# Altium PCB Snap4.PcbDoc
Units mil, origin at the board's own origin, x right, y up, seen from the top; angles counter-clockwise.
Board outline 3550 x 1850 mil, 2 copper layers (Top Layer, Bottom Layer); 59 components, 63 nets, 240 pads, 4 vias.
Unrouted connection lines stored in the file: 142.
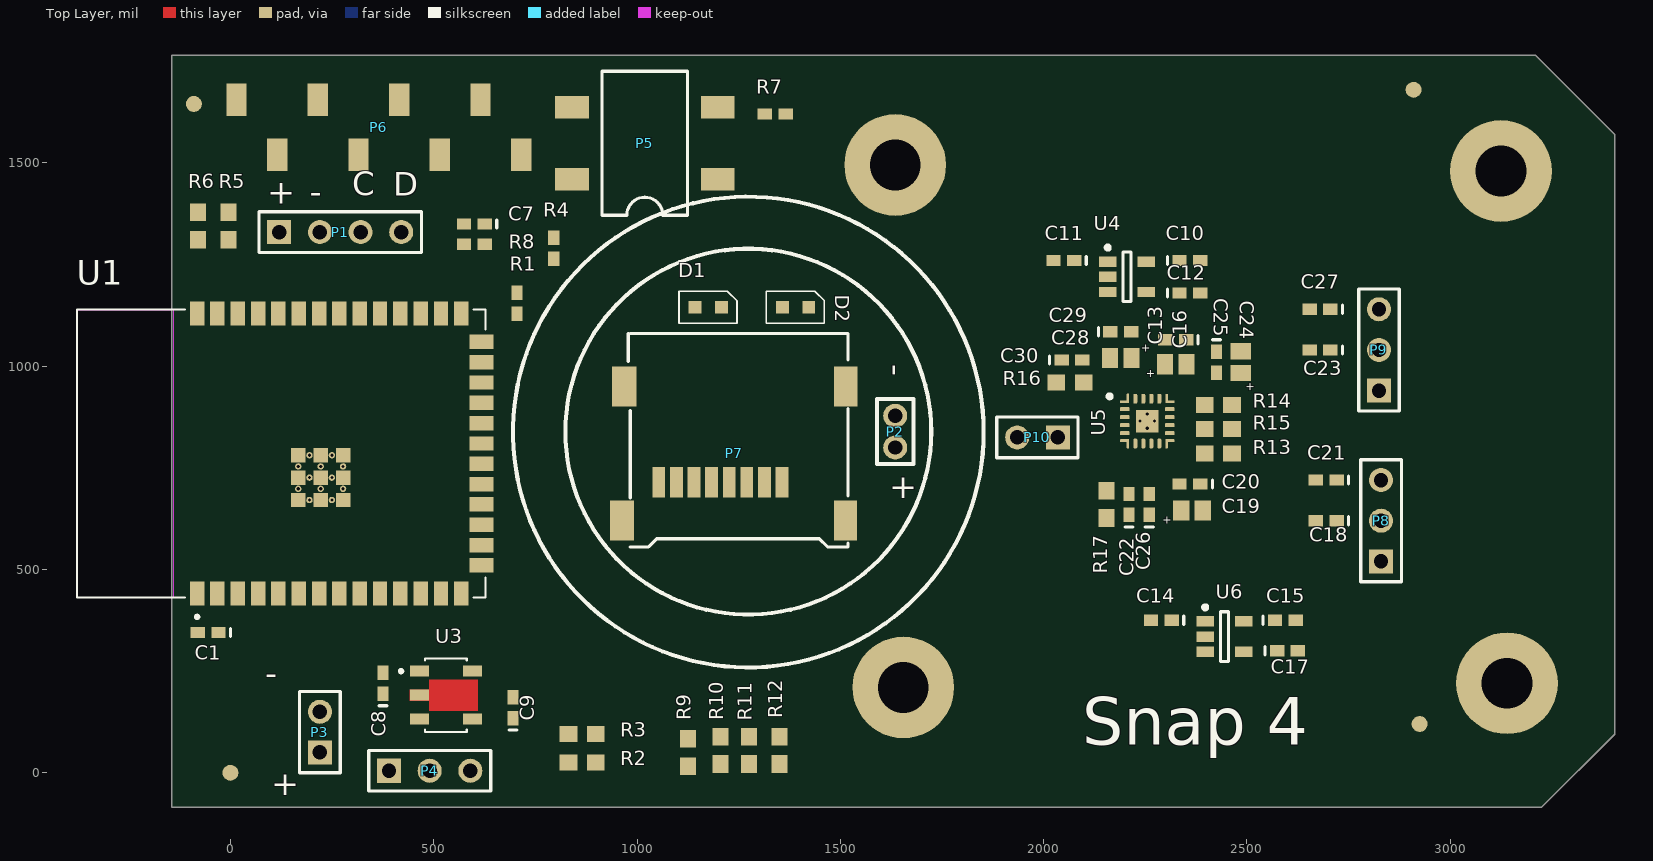
[diagram p0: Top Layer view]
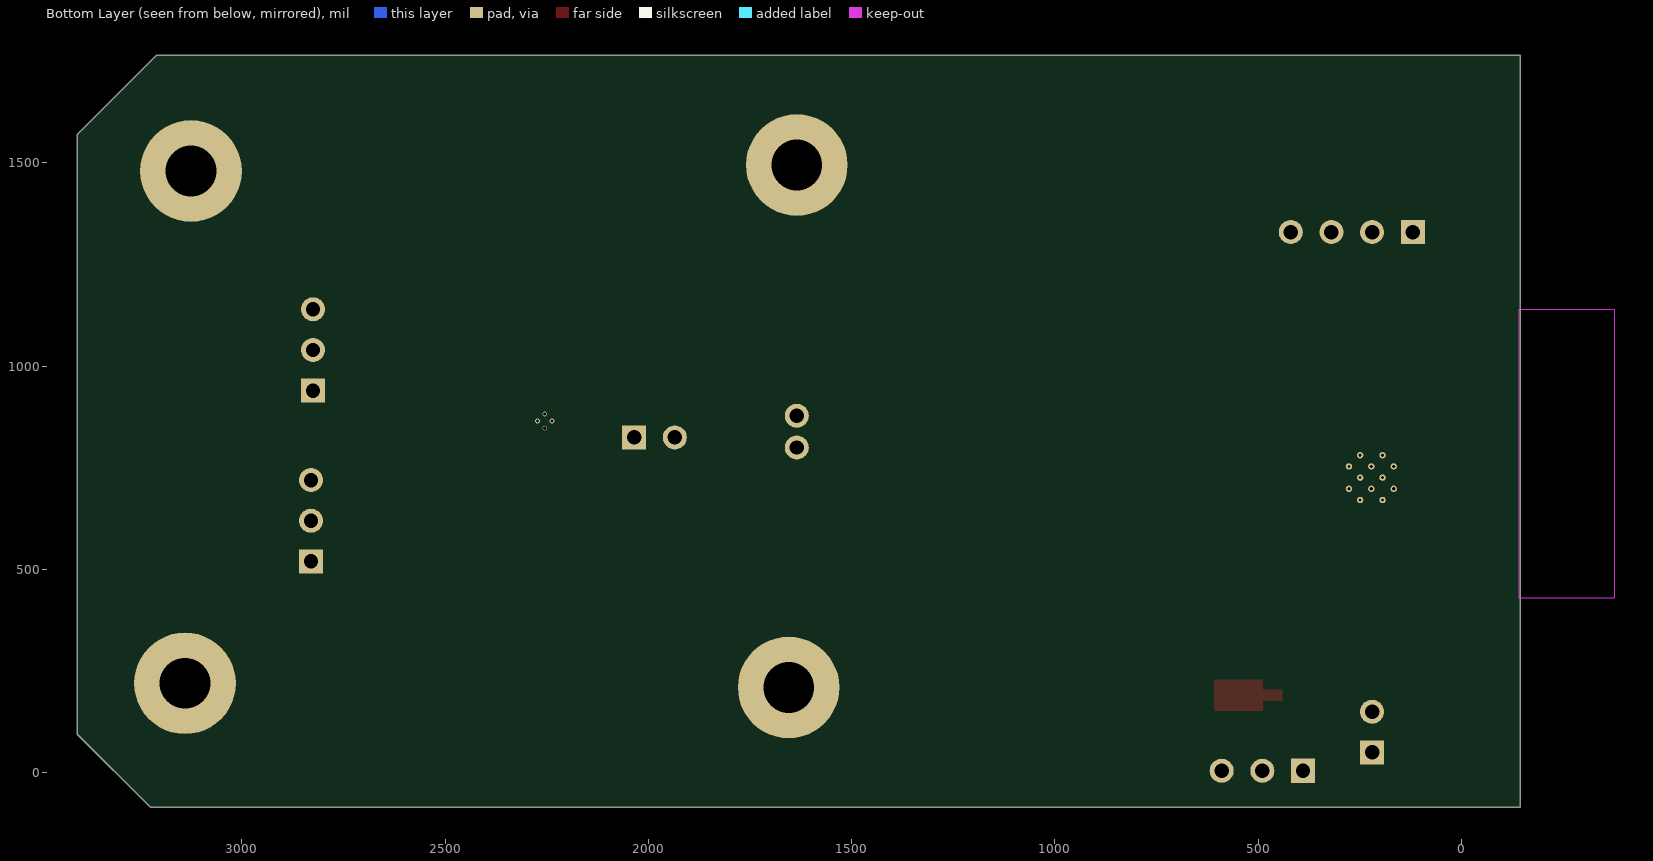
[diagram p1: Bottom Layer view, seen from below]

## Layer stack, top to bottom
Top Solder: solder mask 0.4, Solder Resist, Dk 3.5
Top Layer: signal copper 1.4
Dielectric 1: dielectric 12.6, FR-4, Dk 4.8
Bottom Layer: signal copper 1.4
Bottom Solder: solder mask 0.4, Solder Resist, Dk 3.5

## Board outline
-145,-85 -145,1765 3210,1765 3405,1570 3405,95 3225,-85

## Design rules (kind name [scope] priority, off if disabled: settings)
Clearance [All] p1: gap=10 ignorepadtopadclearanceinfootprint=FALSE except(0: Arc-Hole Track-Hole SMDPad-Hole THPad-Hole Via-Hole Fill-Hole Poly-Hole Region-Hole Text-Hole)
PolygonConnect [All] p1: connectstyle=Relief reliefconductorwidth=10 reliefentries=4 polygonreliefangle="90 Angle" airgapwidth=10
RoutingVias [All] p1: holewidth=28 width=50 viastyle="Through Hole" minholewidth=28 minwidth=50 maxholewidth=28 maxwidth=50
SolderMaskExpansion [All] p1: expansion=4 istentingtop=FALSE
Width [All] p1: maxlimit=10 minlimit=10 preferedwidth=10
30 further rules are at their usual default settings.

## Classes and differential pairs
component class Snap4: C1 C7 C8 C9 D1 D2 P1 P2 P3 P4 P5 P6 P7 R1 R2 R3 R4 R5 R6 R7 R8 R9 R10 R11 R12 U1 U3
component class PCM1822Q1: C10 C11 C12 C13 C14 C15 C16 C17 C18 C19 C20 C21 C22 C23 C24 C25 C26 C27 C28 C29 C30 P8 P9 P10 R13 R14 R15 R16 R17 U4 U5 U6

## Components (designator, comment, footprint, x,y, rotation, side; value= is the part's Value field where it differs from the comment)
C1 "0.1uF" 0402 -55,345 r180 top
C7 "1uF" 0402 600,1350 r180 top value=0.1uF
C8 "4.7uF" 0402 375,220 r90 top value=0.1uF
C9 "4.7uF" 0402 695,160 r90 top value=0.1uF
C10 "2.2uF" 0402 2360,1260 r0 top value=0.1uF
C11 "1uF" 0402 2050,1260 r180 top value=0.1uF
C12 "10nF" 0402 2360,1180 r0 top value=0.1uF
C13 "1uF" Tant0805 2325,1005 r180 top value=10uF
C14 "1uF" 0402 2289.84,375 r180 top value=0.1uF
C15 "2.2uF" 0402 2594.84,375 r0 top value=0.1uF
C16 "0.1uF" 0402 2325,1065 r180 top
C17 "10nF" 0402 2599.84,300 r0 top value=0.1uF
C18 "1.0uF" 0402 2695,620 r180 top value=0.1uF
C19 "10uF" Tant0805 2365,645 r180 top
C20 "0.1uF" 0402 2360,710 r180 top
C21 "1.0uF" 0402 2695,720 r180 top value=0.1uF
C22 "22pF" 0402 2210,660 r90 top value=0.1uF
C23 "1.0uF" 0402 2680,1040 r180 top value=0.1uF
C24 "10uF" Tant0805 2485,1010 r270 top
C25 "0.1uF" 0402 2425,1010 r270 top
C26 "22pF" 0402 2260,660 r90 top value=0.1uF
C27 "1.0uF" 0402 2680,1140 r180 top value=0.1uF
C28 "10uF" Tant0805 2190,1020 r0 top
C29 "0.1uF" 0402 2190,1085 r0 top
C30 "1.0uF" 0402 2070,1015 r0 top value=0.1uF
D1 "LED_0603" Diode0603 1175,1145 r0 top
D2 "LED_0603" Diode0603 1390,1145 r0 top
P1 "Display" HDR1X4 120,1330 r0 top
P2 "BAT" HDR_2x1_2mm 1635,799.37 r0 top
P3 "GND Tie" HDR1X2 220,50 r90 top
P4 "switch" HDR1X3 390,5 r0 top
P5 "factory reset" SOP4 1198.27,1460 r180 top
P6 "10129380-908001BLF" Header_8_SMT 15,1655 r0 top
P7 "microSD-Molex" microSD_Molex_hinged 983.58,620.51 r90 top
P8 "HYDROPHONE L" HDR1X3 2830,520 r90 top
P9 "HYDROPHONE R" HDR1X3 2825,940 r90 top
P10 "GND Tie" HDR1X2 2035,825 r180 top
R1 "330 Ohm" 2-0402 705,1155 r90 top
R2 "100k" 3-0603 865,25 r180 top
R3 "100k" 3-0603 865,95 r0 top
R4 "330 Ohm" 2-0402 795,1290 r90 top
R5 "4.7k" 3-0603 -5,1345 r90 top
R6 "4.7k" 3-0603 -80,1345 r90 top
R7 "10k" 2-0402 1340,1620 r0 top
R8 "10k" 2-0402 600,1300 r0 top
R9 "10K" 3-0603 1125,50 r90 top
R10 "10K" 3-0603 1205,55 r90 top
R11 "10K" 3-0603 1275,55 r90 top
R12 "10K" 3-0603 1350,55 r90 top
R13 "10k" 3-0603 2430,785 r0 top
R14 "10k" 3-0603 2430,905 r0 top
R15 "10k" 3-0603 2430,845 r0 top
R16 "10k" 3-0603 2065,960 r180 top
R17 "51" 3-0603 2155,660 r270 top
U1 "ESP32-S3-WROOM-1-N16R8" XCVR_ESP32-S3-WROOM-1-N16R2 125,785 r90 top
U3 "3.3V LDO" AP7361C-33Y5-13 465.08,250 r0 top
U4 "ADP1712" MF05A_N 2205,1220 r0 top
U5 "PCM1822-Q1" PCM1822-Q1 2255,865 r0 top
U6 "ADP1712" MF05A_N 2444.84,335 r0 top

## Footprints (in the part's own frame and the unit in brackets; to place one, negate y for a bottom-side part, rotate by r counter-clockwise, add the part's x,y. Pads: shape width x height; smd on the part's side, far side on the other; paste and mask are expansions set on the pad)
2-0402 [mm] "Chip Resistor; Body 1 x 0.5 mm (LxW typ)"
  rect 0.9x0.7 smd: 1(-0.65,0) 2(0.65,0)
3-0603 [mm] "Chip Resistor; Body 1.6 x 0.9 mm (LxW typ)"
  rect 1.1x1 smd: 1(-0.85,0) 2(0.85,0)
0402 [mm] "Chip Capacitor; Body 1.0 x 0.5 mm (LxW typ)"
  rect 0.9x0.7 smd: 1(-0.65,0) 2(0.65,0)
  silkscreen extent -1.4,-0.25 -1.4,0.25
AP7361C-33Y5-13 [mm] "3.3V LDO"
  rect 1.2x0.68 smd: 1(0,0) 3(0,-3) 4(3.3,-3) 5(3.3,0)
  rect 1.2x0.68 smd paste-2 mask+0: 2(0,-1.5)
  Top Layer region: 3.65,-2.465 0.6,-2.465 0.6,-1.84 -0.6,-1.84 -0.6,-1.16 0.6,-1.16 0.6,-0.535 3.65,-0.535
  silkscreen extent -1.25,-3.8 2.95,0.8
Diode0603 [mm]
  rect 0.8x0.8 smd: A(-0.825,0) K(0.825,0)
  silkscreen extent -1.83,-1 1.8,1
HDR1X2 [mm] "Connector; Header; 2 Position"
  rect 1.5x1.5 hole 0.9: 1(0,0)
  round 1.5 hole 0.9: 2(2.54,0)
  silkscreen extent -1.27,-1.27 3.81,1.27
HDR1X3 [mm] "Connector; Header; 3 Position"
  rect 1.5x1.5 hole 0.9: 1(0,0)
  round 1.5 hole 0.9: 2(2.54,0) 3(5.08,0)
  silkscreen extent -1.27,-1.27 6.35,1.27
HDR1X4 [mm] "Connector; Header; 4 Position"
  rect 1.5x1.5 hole 0.9: 1(0,0)
  round 1.5 hole 0.9: 2(2.54,0) 3(5.08,0) 4(7.62,0)
  silkscreen extent -1.27,-1.27 8.89,1.27
HDR_2x1_2mm [mm]
  round 1.5 hole 0.9: 1(0,0.016) 2(0,2)
  silkscreen extent -1.14,-1.02 1.14,3.05
Header_8_SMT [mil] "Amphenol  10129380-908001BLF"
  rect 50x80 smd: 1(0,0) 2(100,-135) 3(200,0) 4(300,-135) 5(400,0) 6(500,-135) 7(600,0) 8(700,-135)
MF05A_N [mm] "SOT23, 5-Leads, Body 2.9x1.6mm, Pitch 0.95mm, Lead Span 2.8mm, IPC Medium Density"
  rect 1.1x0.65 smd: 1(-1.2,0.95) 2(-1.2,0) 3(-1.2,-0.95) 4(1.2,-0.95) 5(1.2,0.95)
  silkscreen extent -1.32,-1.55 0.25,1.95, body extent -0.9,-1.55 0.9,1.55, height 1.19
microSD_Molex_hinged [mm]
  rect 2.5x1.5 smd: 0(0,0.508) 0(8.382,0.381)
  rect 2.5x1.45 smd: 0(0,-13.45) 0(8.382,-13.462)
  rect 1.9x0.8 smd: 1(2.4,-9.475) 2(2.4,-8.375) 3(2.4,-7.275) 4(2.4,-6.175) 5(2.4,-5.075) 6(2.4,-3.975) 7(2.4,-2.875) 8(2.4,-1.775)
  silkscreen extent -1.65,-13.59 11.68,0.13
PCM1822-Q1 [mm] "QFN, 16-Leads, Body 3.00x3.00mm, Pitch 0.50mm, Thermal Pad 1.40x1.40mm, IPC Medium Density"
  rrect50% 0.6x0.25 smd mask+0.07: 1(-1.4,0.75) 2(-1.4,0.25) 3(-1.4,-0.25) 4(-1.4,-0.75) 11(1.4,-0.75) 12(1.4,-0.25) 13(1.4,0.25) 14(1.4,0.75)
  rrect50% 0.575x0.175 smd mask+0.07: 5(-1.413,-1.213) 10(1.412,-1.213) 15(1.412,1.213) 20(-1.412,1.213)
  rrect50% 0.175x0.575 smd mask+0.07: 5(-1.213,-1.412) 10(1.212,-1.412) 15(1.212,1.412) 20(-1.213,1.426)
  rrect50% 0.25x0.6 smd mask+0.07: 6(-0.75,-1.4) 7(-0.25,-1.4) 8(0.25,-1.4) 9(0.75,-1.4) 16(0.75,1.4) 17(0.25,1.4) 18(-0.25,1.4) 19(-0.75,1.4)
  rect 1.4x1.4 smd paste-0.1 mask+0.07: 21(0,0)
  silkscreen extent -2.47,1.43 -2.22,1.67, body extent -1.55,-1.55 1.55,1.55, height 0.8
SOP4 [mm]
  rect 2.1x1.4 smd: 1(0,0) 2(0,-4.5) 3(9.1,-4.5) 4(9.1,0)
  silkscreen extent 1.89,-6.75 7.21,2.25
Tant0805 [mil]
  rect 40x50 smd: 1(-26.5,0) 2(26.5,0)
XCVR_ESP32-S3-WROOM-1-N16R2 [mm]
  rect 1.5x0.9 smd: 1(-8.75,5.26) 2(-8.75,3.99) 3(-8.75,2.72) 4(-8.75,1.45) 5(-8.75,0.18) 6(-8.75,-1.09) 7(-8.75,-2.36) 8(-8.75,-3.63) 9(-8.75,-4.9) 10(-8.75,-6.17) 11(-8.75,-7.44) 12(-8.75,-8.71) 13(-8.75,-9.98) 14(-8.75,-11.25) 27(8.75,-11.25) 28(8.75,-9.98) 29(8.75,-8.71) 30(8.75,-7.44) 31(8.75,-6.17) 32(8.75,-4.9) 33(8.75,-3.63) 34(8.75,-2.36) 35(8.75,-1.09) 36(8.75,0.18) 37(8.75,1.45) 38(8.75,2.72) 39(8.75,3.99) 40(8.75,5.26)
  rect 0.9x1.5 smd: 15(-6.985,-12.5) 16(-5.715,-12.5) 17(-4.445,-12.5) 18(-3.175,-12.5) 19(-1.905,-12.5) 20(-0.635,-12.5) 21(0.635,-12.5) 22(1.905,-12.5) 23(3.175,-12.5) 24(4.445,-12.5) 25(5.715,-12.5) 26(6.985,-12.5)
  rect 0.9x0.9 smd: 41_1(-1.5,-2.46) 41_2(-2.9,-2.46) 41_3(-0.1,-2.46) 41_4(-2.9,-3.86) 41_5(-1.5,-3.86) 41_6(-0.1,-3.86) 41_7(-2.9,-1.06) 41_8(-1.5,-1.06) 41_9(-0.1,-1.06)
  round 0.4 hole 0.2 mask+0: 41_10(-1.5,-1.76) 41_11(-2.9,-1.76) 41_12(-0.1,-1.76) 41_13(-2.9,-3.16) 41_14(-1.5,-3.16) 41_15(-0.1,-3.16) 41_16(-2.2,-1.06) 41_17(-0.8,-1.06) 41_18(-2.2,-2.46) 41_19(-0.8,-2.46) 41_20(-2.2,-3.86) 41_21(-0.8,-3.86)
  Keep-Out Layer region: 9,6.75 -9,6.75 -9,12.75 9,12.75
  Keep-Out Layer region: 9,6.75 -9,6.75 -9,12.75 9,12.75
  silkscreen extent -10.3,-12.75 9,12.75

## Part data
C1 C7 C8 C9 C10 C11 C12 C14 C15 C16 C17 C18 C20 C21 C22 C23 C25 C26 C27 C29 C30: library part C0402, "Ceramic Chip Capacitor - Standard", PackageDocument=Mar-2001, Code_IPC="1005 [0402]", Code_JEITA=0402, ComponentLink1Description="Manufacturer Link", ComponentLink1URL=http://www.kemet.com/, ComponentLink2Description=Datasheet, ComponentLink2URL=http://www.kemet.com/kemet/web/homepage/kechome.nsf/vapubfilesname/F3102TA.pdf/$file/F3102TA.pdf, DatasheetDocument=Mar-2001, LatestRevisionDate=19-Mar-2004, LatestRevisionNote="Silkscreen size reduced.", Note="Footprint corresponds to dimensions for bulk cassette packaging. This case size has tightened tolerances.", PackageReference=0402, Published=17-Jul-2002, Publisher="Altium Limited"
C13 C19 C24 C28: library part Tant0805
D1 D2: Supplier Part Number 1=18AC7715, Supplier 1=Newark
P1: library part "Header 4", "Header, 4-Pin", LatestRevisionDate=17-Jul-2002, LatestRevisionNote="Re-released for DXP Platform.", Publisher="Altium Limited"
P2: library part HDR_2x1_2mm
P3 P10: library part "Header 2", "Header, 2-Pin", LatestRevisionDate=17-Jul-2002, LatestRevisionNote="Re-released for DXP Platform.", Publisher="Altium Limited"
P4 P8 P9: library part "Header 3", "Header, 3-Pin", LatestRevisionDate=17-Jul-2002, LatestRevisionNote="Re-released for DXP Platform.", Publisher="Altium Limited"
P5: library part pushbutton, Supplier Part Number 1=450-1757-2-ND, Supplier 1=Digi-Key
P6: library part Header8_SMT, "Surface mount header", Supplier Part Number 1=649-1012938090801BLF, Supplier 1=Mouser
P7: library part microSD_Molex_hinged, Supplier Part Number 1=WM19081DKR-ND, Supplier 1=Digi-Key
R1 R4 R7 R8: library part ERJ2RB, "Precision Thick Film Chip Resistor, 10 Ohm to 1M Ohm Range, 1% and 0.5% Tolerance, 0402 Size, 0.063 W", PackageDocument=Mar-2003, Code_IPC="1005 [0402]", ComponentLink1Description="Manufacturer Link", ComponentLink1URL=http://www.panasonic.com/industrial/components/resistive_products.htm, ComponentLink2Description=Datasheet, ComponentLink2URL=http://www.panasonic.com/industrial/components/pdf/AOA0000CE2.pdf, LatestRevisionDate=19-Mar-2004, LatestRevisionNote="Silkscreen size reduced.", PackageReference=2-0402, Published=17-Dec-2003, Publisher="Altium Limited"
R2 R3 R5 R6 R13 R14 R15 R16 R17: library part ERJ3RK, "Precision Thick Film Chip Resistor, 10 Ohm to 1M Ohm Range, 1% and 0.5% Tolerance, 0603 Size, 0.063 W", PackageDocument=Mar-2003, Code_IPC="1608 [0603]", ComponentLink1Description="Manufacturer Link", ComponentLink1URL=http://www.panasonic.com/industrial/components/resistive_products.htm, ComponentLink2Description=Datasheet, ComponentLink2URL=http://www.panasonic.com/industrial/components/pdf/AOA0000CE2.pdf, LatestRevisionDate=19-Mar-2004, LatestRevisionNote="Silkscreen size reduced.", PackageReference=3-0603, Published=17-Dec-2003, Publisher="Altium Limited"
R9 R10 R11 R12: library part ERJ3EK, "Precision Thick Film Chip Resistor, 10 Ohm to 1M Ohm Range, 1% and 0.5% Tolerance, 0603 Size, 0.063 W", PackageDocument=Mar-2003, Code_IPC="1608 [0603]", ComponentLink1Description="Manufacturer Link", ComponentLink1URL=http://www.panasonic.com/industrial/components/resistive_products.htm, ComponentLink2Description=Datasheet, ComponentLink2URL=http://www.panasonic.com/industrial/components/pdf/AOA0000CE2.pdf, LatestRevisionDate=19-Mar-2004, LatestRevisionNote="Silkscreen size reduced.", PackageReference=3-0603, Published=17-Dec-2003, Publisher="Altium Limited"
U1: library part ESP32-S3-WROOM-1-N16R2, "Bluetooth, WiFi 802.11b/g/n, Bluetooth v5.0 Transceiver Module 2.4GHz PCB Trace Surface Mount", Package=None, Availability="In Stock", Check_prices=https://www.snapeda.com/parts/ESP32-S3-WROOM-1-N16R2/Espressif+Systems/view-part/?ref=eda, MF="Espressif Systems", MP=ESP32-S3-WROOM-1-N16R2, Price=None, Purchase-URL=https://pricing.snapeda.com/search/part/ESP32-S3-WROOM-1-N16R2/?ref=eda, SnapEDA_Link=https://www.snapeda.com/parts/ESP32-S3-WROOM-1-N16R2/Espressif+Systems/view-part/?ref=snap
U3: library part AP7361C-33Y5-13
U4 U6: library part LP3985IM5-3.3, "Micropower, 150mA Low-Noise Ultra Low-Dropout CMOS Voltage Regulator", DigiKeyPartNumber=LP3985IM5-3.3CT-ND, Manufacturer="National Semiconductor", PackageTopMarking=LDQB*XTT, PowerWise=N, ComponentLink1Description="LP3985 Datasheet", ComponentLink1URL=http://www.national.com/ds/LP/LP3985.pdf, ComponentLink2Description="LP3985 Web Page", ComponentLink2URL=http://www.national.com/pf/LP/LP3985.html, ComponentLink3Description="MF05A Package Page", ComponentLink3URL=http://www.national.com/packaging/folders/mf05a.html, CompType="LDO IC", DatasheetVersion=Aug-2005, PackageDescription="Molded SOT-23, .115 x .063 x .040 in Body, 5 Lead, .0375 in Pitch", PackageReference=MF05A, PackageVersion="revD, Aug-2008", PartNumber=LP3985IM5-3.3, PinCount=5, Published=4-Dec-2008, Publisher="Altium Limited", RoHS=O
U5: "TI PCM1822-Q1 Stereo Channel, 32-Bit, 192-kHz, Burr-Brown Audio ADC"

## Free pads (board coordinates)
  round 250 hole 125: 0(1655,210) 1(3125,1480) 2(3140,220) 3(1635,1495)
  round 39.37 smd: 10(-90,1645) 10(0,0) 10(2910,1680) 10(2925,120)

## Via types
v1: diameter 11.81, hole 7.87, Top Layer to Bottom Layer, 4 vias

## Nets (pads, with @x,y where several pads share a name; then routed paths per layer and width w, separated by ;. In a path a pad name is that pad's centre, name@x,y a point inside that pad or via, vN(x,y) a via of type N, cw(c..) or ccw(c..) an arc to the next point about the centre after c; other vN are vias at no path point)
3V3: C1.1 C8.2 P1.1 P7.4 R5.2 R6.2 R8.1 R9.1 R10.1 R11.1 R12.1 U1.2 U3.5
4V2: P2.1 P3.1 P4.2 R2.2
AGND: C10.2 C11.2 C12.2 C13.1 C14.2 C15.2 C16.1 C17.2 C19.1 C20.1 C21.1 C22.1 C24.1 C25.1 C26.1 C27.1 C28.1 C29.1 C30.1 P8.3 P9.3 P10.1 R13.2 R14.2 R15.2 R16.2 U4.2 U5.5 U5.10 U5.15 U5.20 U5.21 U6.2
  other v1: 2255,847.28 2237.28,865 2272.72,865 2255,882.72
BCLK: C22.2 U1.17 U5.7
BUTTON: P5.1 U1.15
CHIP_PU: C7.1 P6.6 R8.2 U1.3
CHRGA: U1.25
CS: P7.2 R9.2 U1.5
D+: U1.14
D-: U1.13
DGND: C1.2 C7.2 C8.1 C9.2 D1.K D2.K P1.2 P2.2 P3.2 P6.1 P7.6 P10.2 R3.1 R7.2 U1.1 U1.40 U1.41_1 U1.41_2 U1.41_3 U1.41_4 U1.41_5 U1.41_6 U1.41_7 U1.41_8 U1.41_9 U3.2
GPIO0: P6.7 P6.8 U1.27
GPS_EN: U1.20
GPS_PIN: U1.35
GPS_RST: U1.32
GREEN: R1.2 U1.22
HYDRO_EN: U1.19 U4.3 U6.3
I2SDIN: U1.12
I2SDOUT: R17.2 U1.18
IN_R: C23.1 P9.2
IO38: U1.31
IR_SLEEP: U1.24
LRCLK: C26.2 U1.26 U5.8
MCLK: U1.9
MISO: P7.7 R12.2 U1.4
MOSI: P7.3 R11.2 U1.7
NetC12_1: C12.1 U4.4
NetC17_1: C17.1 U6.4
NetC18_1: C18.1 P8.2
NetD1_A: D1.A R1.1
NetD2_A: D2.A R4.1
NetP5_2: P5.2 R7.1
PCM1: C18.2 U5.1
PCM2: C21.2 U5.2
PCM3: C23.2 U5.3
PCM4: C27.2 U5.4
PCM6: R17.1 U5.6
PCM9: C10.1 C13.2 C16.2 C19.2 C20.2 U4.5 U5.9 U5.16
PCM11: R13.1 U5.11
PCM12: R15.1 U5.12
PCM13: R14.1 U5.13
PCM14: C24.2 C25.2 U5.14
PCM17: C28.2 C29.2 U5.17
PCM18: C30.2 U5.18
PCM19: R16.1 U5.19
RED: R4.2 U1.23
RESVD1: U1.28
RESVD2: U1.29
RESVD3: U1.30
RI: U1.16
RX_GPS: U1.33
RX_IRIDIUM: U1.38
RXD0: P6.4 U1.36
SCK: P7.5 R10.2 U1.8
SCL: P1.3 R6.1 U1.11
SD_EN: U1.6
SDA: P1.4 R5.1 U1.10
TX_GPS: U1.34
TX_IRIDIUM: U1.39
TXD0: P6.5 U1.37
VH: C15.1 P8.1 P9.1 U6.5
VIN: C9.1 C11.1 C14.1 P4.3 P6.3 U3.1 U3.4 U4.1 U6.1
VSENS: R2.1 R3.2 U1.21
pads on no net: P4.1 P5.3 P5.4 P6.2 P7.0 P7.1 P7.8 U1.41_10 U1.41_11 U1.41_12 U1.41_13 U1.41_14 U1.41_15 U1.41_16 U1.41_17 U1.41_18 U1.41_19 U1.41_20 U1.41_21 U3.3

## Silkscreen, mask and mechanical layers (free items; w line width, h text height)
Top Overlay:
  circle w10: c1273.7,838 r579
  circle w10: c1273.7,839 r450
  text "C" at 300,1401.11 h100
  text "+" at 90,1400 h60
  text "-" at 195,1400.01 h60
  text "D" at 400,1400 h100
  text "-" at 1654.99,975 h60 r90
  text "+" at 1620,675 h60
  text "-" at 85,215.01 h60
  text "Snap 4" at 2095,30.54 h200
  text "+" at 100,-55 h60
Mechanical 1:
  the board outline again, w10

## Text inside footprints (layer, text, board x,y; h text height)
C13: Top Overlay "+" at 2275,990 h19.68 r180
C19: Top Overlay "+" at 2315,630 h19.68 r180
C24: Top Overlay "+" at 2500,960 h19.68 r270
C28: Top Overlay "+" at 2240,1035 h19.68
U1: Mechanical 13 "ANTENNA" at -249.02,607.83 h50 r90